# EAGLE board v2 (EAGLE 8.5.1)
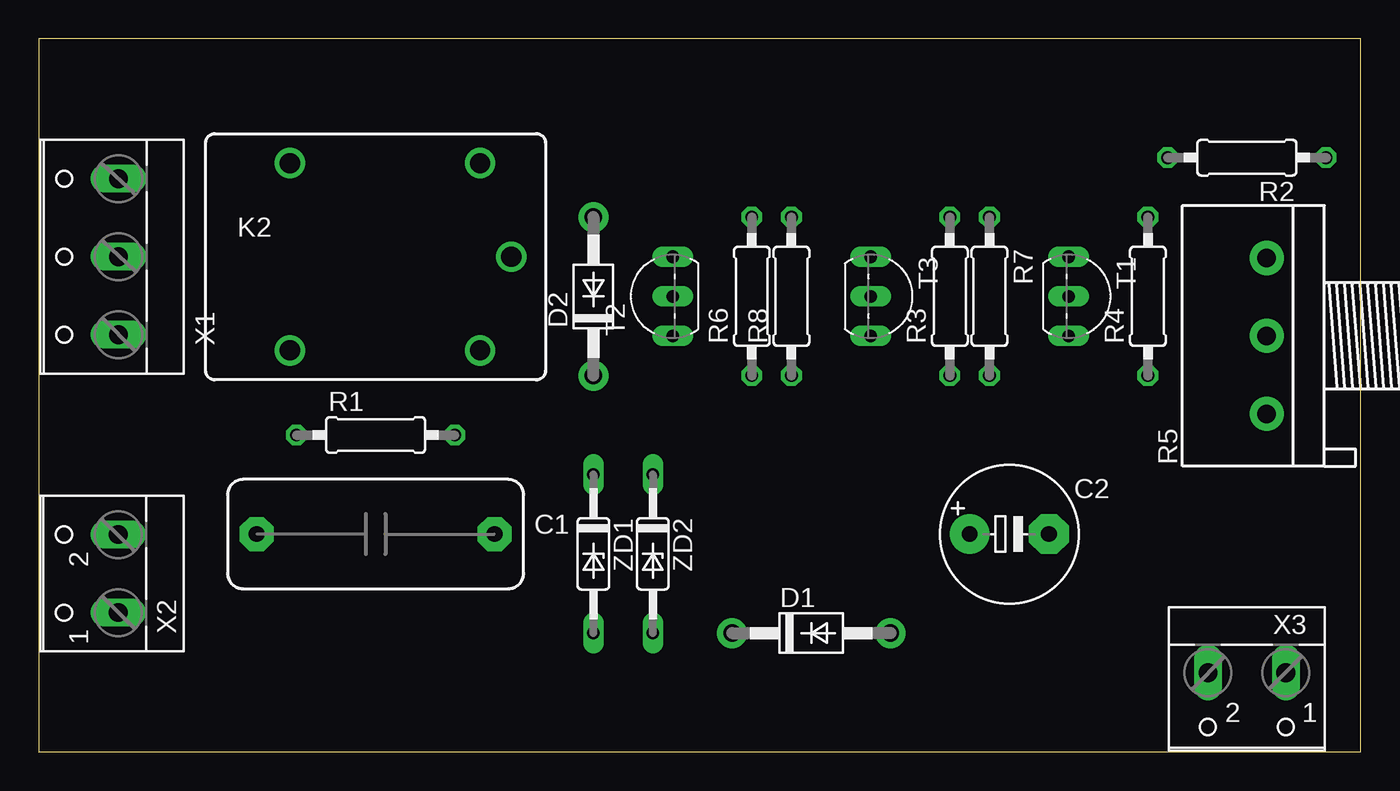
[diagram p0: board, top side]
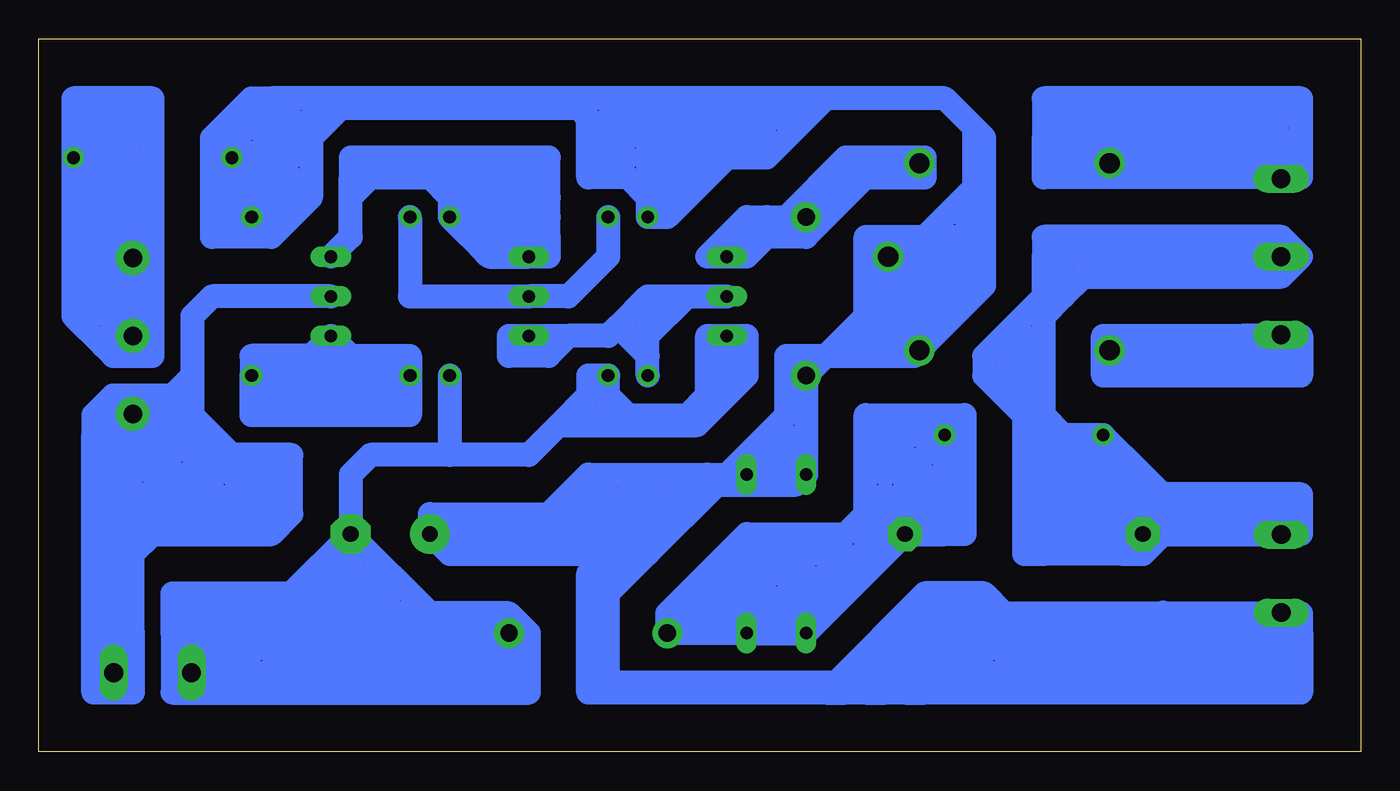
[diagram p1: board, bottom side, seen from below]

Size 84.76 x 45.71 mm. Coordinates in mm from the lower left corner, seen from the top.
Outline: 0,0 84.76,0 84.76,45.71 0,45.71 0,0
Copper layers (1*16): Top 0.035mm / dielectric 1.5mm / Bottom 0.035mm
Design rules "default": minimum track width 6mil, minimum drill 0.35mm, track to track 6mil, track to pad 6mil, pad to pad 6mil, via to via 6mil, smd to smd 6mil, copper to edge 40mil, drill to drill 6mil, minimum pad ring 10mil, minimum via ring 8mil, stop-mask expansion 4mil, vias tented up to drill 0mil, thermal gap 10mil

## Footprints (pad centres in the part's own frame; a part is rotated, then mirrored left to right if it is on the bottom)
C150-190X070 = drill 1.016 pad 2.184 octagon: 1 -7.62,0; 2 7.62,0
E5-8,5 = drill 1.016 pad 2.54: + -2.54,0 | drill 1.016 pad 2.54 octagon: - 2.54,0
DO41-10 = drill 1.118 pad 1.93: A 5.08,0; C -5.08,0
JS-M = drill 1.3: 1 6.7,6; 2 6.7,-6; C 8.7,0; NC -5.5,-6; NO -5.5,6
0207/10 = drill 0.813 octagon: 1 -5.08,0; 2 5.08,0
3RP/1610N = drill 1.2 pad 2.184: 1 -5,0; 2 0,0; 3 5,0
TO92-EBC-OVAL = drill 0.813 long: B 0,-1.27; C 2.54,-1.27; E -2.54,-1.27
W237-103 = drill 1.194 long: 1 -5,-1.29; 2 0,-1.29; 3 5,-1.29
W237-102 = drill 1.194 long: 1 -2.5,-1.27; 2 2.5,-1.27
DO35Z10 = drill 0.813 long: A 5.08,0; C -5.08,0

## Placement (x,y rotation side)
C1  1 uF 450V  [C150-190X070]  21.59,13.97 0 top
C2  1000uF 35V  [E5-8,5]  62.23,13.97 0 top
D1  1N4007  [DO41-10]  49.53,7.62 0 top
D2  1N4007  [DO41-10]  35.56,29.21 90 top
K2  JS-M1-24V-5  [JS-M]  21.59,31.75 0 top
R1  1M  [0207/10]  21.59,20.32 0 top
R2  1K  [0207/10]  77.47,38.1 180 top
R3  51K  [0207/10]  58.42,29.21 90 top
R4  10K  [0207/10]  71.12,29.21 90 top
R5  100k  [3RP/1610N]  78.74,26.67 90 top
R6  1K  [0207/10]  45.72,29.21 90 top
R7  22K  [0207/10]  60.96,29.21 270 top
R8  22K  [0207/10]  48.26,29.21 90 top
T1  2N2222  [TO92-EBC-OVAL]  67.31,29.21 270 top
T2  2N2222  [TO92-EBC-OVAL]  39.37,29.21 90 top
T3  2N2222  [TO92-EBC-OVAL]  54.61,29.21 270 top
X1  [W237-103]  3.81,31.75 90 top
X2  [W237-102]  3.81,11.43 90 top
X3  [W237-102]  77.47,3.81 180 top
ZD1  24V 1Wat  [DO35Z10]  35.56,12.7 270 top
ZD2  24V 1Wat  [DO35Z10]  39.37,12.7 270 top

## Library data of the parts
C1 = cap-master
C2 = rcl; SPICEPREFIX: C
D1 D2 T1-T3 = adafruit
K2 = relay; MF: FARNELL; MPN: JSM1-12V-5; OC_FARNELL: 910351; OC_NEWARK: 14J1764
R1-R4 R6-R8 = rcl; SPICEPREFIX: R
R5 = pot
X1-X3 = con-wago-500
ZD1 ZD2 = diodes

## Nets
L: C2.+ D2.C K2.2 K2.C R2.2 R4.2 R6.2 X2.1 ZD1.C ZD2.C
N: C1.1 R1.1 X1.2 X2.2
N$1: R7.1 R8.2 T3.B
N$2: R3.2 T1.E T3.E
N$3: D2.A K2.1 T2.C
N$4: C1.2 D1.C R1.2 ZD1.A ZD2.A
N$5: R4.1 R7.2 T1.C
N$7: R6.1 T2.B T3.C
N$8: R2.1 R5.2 R5.3
NC: K2.NC X1.1
NO: K2.NO X1.3
S1: R5.1 T1.B X3.1
S2: C2.- D1.A R3.1 R8.1 T2.E X3.2

## Tracks (layer width: path | path; a pad name or v marks a point on that pad's centre or on a via)
L
  Bottom 1.524: 27.94,3.81 26.67,5.08 | 26.67,5.08 26.04,5.71 | 34.29,3.81 48.26,3.81 | K2.C 30.29,29.21 29.21,30.29 29.21,31.75 26.67,31.75 26.67,30.48 29.21,27.94 | 30.29,27.75 30.29,27.94 29.21,27.94 | 30.29,27.75 29.84,27.3 | 29.84,27.3 29.21,26.67 | 29.21,26.67 K2.2 | K2.2 30.48,25.75 | 30.48,25.75 31.75,25.75 | 31.75,25.75 33.94,25.75 D2.C ZD1.C | ZD2.C ZD1.C | ZD2.C 40.64,17.78 | 40.64,17.78 41.27,17.14 | 41.27,17.14 45.72,12.7 | 45.72,12.7 48.26,10.16 48.26,3.81 | 30.29,27.75 31.75,26.29 31.75,25.75 | 29.84,27.3 30.48,26.67 30.48,25.75 | K2.2 24.13,29.91 24.13,33.02 | 24.13,33.02 24.13,39.37 24.77,40.01 | 24.77,40.01 26.67,41.91 34.29,41.91 | 45.72,41.91 45.72,35.56 | 45.72,35.56 R6.2 | 34.29,41.91 45.72,41.91 | 46.99,12.7 58.42,12.7 C2.+ 59.69,15.24 52.07,15.24 | 46.99,12.7 45.72,12.7 | 45.72,41.91 50.8,41.91 | 50.8,41.91 66.04,41.91 | 66.04,41.91 69.85,41.91 | 69.85,41.91 71.75,40.01 | 71.75,40.01 72.39,39.37 | 72.39,39.37 R2.2 72.39,36.83 | 72.39,36.83 72.39,35.56 | 72.39,35.56 R4.2 | 25.4,5.08 26.04,5.71 | 26.04,5.71 25.4,6.35 | 25.4,6.35 24.13,7.62 | 24.13,7.62 24.13,10.16 | 25.4,6.35 24.13,6.35 | 24.13,10.16 25.4,10.16 | 25.4,10.16 27.94,10.16 33.66,4.45 | 33.66,4.45 34.29,3.81 | 34.29,3.81 33.02,3.81 | 31.75,3.81 30.48,3.81 | 29.21,3.81 27.94,3.81 | 29.21,3.81 25.4,7.62 25.4,8.89 | 25.4,10.16 25.4,8.89 | 25.4,8.89 29.21,5.08 | 33.02,3.81 27.94,8.89 26.67,8.89 31.75,3.81 | 31.75,3.81 33.02,3.81 | 25.4,5.08 26.67,5.08 | 29.21,3.81 30.48,3.81 | 30.48,3.81 29.21,5.08 | 29.21,5.08 26.67,5.08 | 48.26,15.24 52.07,15.24 | 52.07,15.24 51.44,15.88 | 51.44,15.88 49.53,17.78 41.91,17.78 | 41.91,17.78 40.64,17.78 | 40.64,17.78 36.83,21.59 36.83,25.4 34.29,25.4 | 34.29,25.4 28.64,25.4 K2.2
  Bottom 1.524: 31.75,27.94 31.11,28.57 | 31.11,28.57 30.48,29.21 | 31.11,28.57 31.75,29.21 | 31.75,29.21 31.75,33.02 27.94,33.02 | 27.94,33.02 25.4,33.02 | 25.4,33.02 24.13,33.02 | 29.21,26.67 25.4,30.48 25.4,33.02 | 29.21,27.94 29.21,29.21 27.94,30.48 | 34.29,25.4 31.75,27.94 | 31.75,27.94 31.75,29.21 | 48.26,3.81 49.53,3.81 49.53,11.43 48.26,11.43 46.99,12.7 | 33.66,4.45 47.62,4.45 48.26,3.81 | 46.99,12.7 45.72,13.97 | 45.72,13.97 43.81,15.88 45.09,15.88 | 41.91,17.78 43.18,16.51 44.45,16.51 45.09,15.88 | 45.09,15.88 46.99,13.97 | 45.72,13.97 49.53,13.97 46.99,16.51 45.72,16.51 48.26,13.97 58.42,13.97 | 51.44,15.88 48.9,15.88 48.26,16.51 49.53,16.51 | ZD2.C 36.83,20.32 36.83,19.05 38.1,19.05 ZD2.C | 41.27,17.14 36.2,17.14 ZD1.C | 35.56,40.64 38.1,38.1 40.64,38.1 44.45,34.29 R6.2 | R6.2 44.45,35.56 | 44.45,35.56 40.64,39.37 | 40.64,39.37 40.64,40.64 | 40.64,40.64 44.45,40.64 44.45,36.83 | 44.45,35.56 44.45,36.83 | 44.45,36.83 43.18,38.1 43.18,39.37 40.64,39.37 | 40.64,39.37 38.1,39.37 | 34.29,41.91 35.56,40.64 | 35.56,40.64 40.64,40.64 | 45.72,35.56 46.99,36.83 49.53,36.83 49.53,40.64 | 49.53,40.64 50.16,41.27 | 50.16,41.27 50.8,41.91 | 49.53,40.64 46.99,38.1 48.26,38.1 48.26,40.64 46.99,40.64 46.99,39.37 | 50.16,41.27 65.41,41.27 67.31,39.37 | 67.31,39.37 67.31,35.56 69.85,33.02 73.66,33.02 73.66,34.29 | 73.66,34.29 73.66,39.37 71.12,41.91 69.85,41.91 | 73.66,34.29 69.85,34.29 68.58,35.56 68.58,36.83 69.85,35.56 72.39,35.56 | 72.39,36.83 69.85,36.83 67.31,39.37 | 66.04,41.91 69.85,38.1 71.12,38.1 | 71.12,38.1 72.39,39.37 | 71.75,40.01 69.22,40.01 68.58,40.64 69.85,40.64 69.85,39.37 71.12,38.1 | 27.94,3.81 3.81,3.81 3.81,5.08
  Bottom 1.524: 27.94,33.02 25.4,35.56 | 25.4,35.56 24.77,36.2 24.77,40.01 | 25.4,35.56 25.4,34.29 | 24.13,10.16 22.86,8.89 12.7,8.89 | 12.7,8.89 12.66,8.93 | 12.7,8.89 5.04,8.89 | 5.04,8.89 X2.1 4.42,8.28 | 5.04,8.89 3.81,8.89 3.81,7.66 | 4.42,8.28 3.81,7.66 | 3.81,7.66 3.81,6.35 | 3.81,6.35 3.81,5.08 | 25.4,5.08 3.81,5.08 | 3.81,6.35 22.86,6.35 24.13,7.62 | 24.13,7.62 5.08,7.62 4.42,8.28
N
  Bottom 1.524: C1.1 13.97,16.51 | 13.97,16.51 13.97,17.78 | 13.97,17.78 R1.1 17.78,20.32 | 17.78,20.32 19.05,20.32 | 19.05,20.32 20.32,21.59 | 20.32,31.75 X1.2 5.08,31.75 | X2.2 5.04,13.93 | 3.81,15.24 12.7,15.24 13.97,16.51 | X2.2 5.04,13.97 3.81,13.97 3.81,15.24 | X2.2 12.7,13.93 | 12.7,13.93 13.93,13.93 C1.1 | 3.81,15.24 3.81,16.51 12.7,16.51 13.97,17.78 | C1.1 15.24,12.7 | 20.32,12.7 20.32,13.97 | 20.32,13.97 20.32,19.05 | 20.32,19.05 20.32,21.59 | 15.24,12.7 20.32,12.7 | 20.32,13.97 15.24,13.97 15.24,17.78 16.51,19.05 | 17.78,20.32 16.51,19.05 | 16.51,19.05 16.51,15.24 17.78,15.24 | 17.78,15.24 19.05,15.24 19.05,19.05 17.78,19.05 17.78,15.24 | 20.32,19.05 19.05,20.32 | 20.32,21.59 20.32,27.94 | 20.32,27.94 20.32,29.21 | 20.32,29.21 20.32,30.48 | 20.32,30.48 20.32,31.75 | 20.32,29.21 24.13,25.4 24.13,24.13 21.59,21.59 | 21.59,21.59 21.59,12.7 20.32,12.7 | 21.59,21.59 21.59,24.13 | 21.59,24.13 21.59,26.67 22.86,25.4 21.59,24.13 | 21.59,24.13 22.86,24.13 | 20.32,29.21 19.05,29.21 | 19.05,29.21 17.78,30.48 5.08,30.48 3.81,31.75 5.08,33.02 20.32,33.02 20.32,31.75 | 20.32,30.48 19.05,30.48 | 19.05,29.21 20.32,27.94 | 15.24,12.7 13.93,12.7 12.7,13.93
N$1
  Bottom 1.524: R8.2 48.26,31.75 50.8,29.21 T3.B 60.96,29.21 R7.1
N$2
  Bottom 1.524: 57.78,33.66 R3.2 58.42,35.56 | 57.78,33.66 56.52,32.38 | 56.52,32.38 55.88,31.75 T3.E | T1.E 64.77,33.02 64.77,35.56 | 64.77,35.56 64.77,36.83 | 64.77,36.83 63.5,36.83 | 63.5,36.83 59.69,36.83 | 59.69,36.83 58.42,35.56 | T3.E 52.07,33.02 | 64.77,36.83 64.77,38.1 52.07,38.1 52.07,35.56 | 52.07,33.02 52.07,34.29 | 52.07,34.29 52.07,35.56 | 59.69,36.83 53.34,36.83 | 58.42,35.56 52.07,35.56 | 57.78,33.66 57.15,34.29 52.07,34.29 | 56.52,32.38 55.88,33.02 53.34,33.02 | 52.07,33.02 52.07,31.75 T3.E | 63.5,36.83 64.77,35.56
N$3
  Bottom 1.524: K2.1 32.1,37.75 32.38,37.47 | 32.38,37.47 D2.A 36.83,34.29 | T2.C 38.1,34.29 | 38.1,34.29 36.83,34.29 | 31.75,36.83 27.94,36.83 27.94,38.1 33.02,38.1 36.83,34.29 | 32.38,37.47 31.75,36.83 | 31.75,36.83 35.56,33.02 38.1,33.02 39.37,31.75 41.91,31.75 39.37,34.29 38.1,34.29
N$4
  Bottom 1.524: R1.2 29.21,17.78 C1.2 | C1.2 ZD1.A | ZD1.A 36.83,7.62 | 36.83,7.62 38.1,7.62 | 38.1,7.62 ZD2.A | ZD2.A D1.C 44.45,8.89 39.37,13.97 33.02,13.97 31.75,15.24 31.75,21.59 25.4,21.59 25.4,13.97 26.67,13.97 | 26.67,13.97 R1.2 | R1.2 30.48,20.32 30.48,17.78 29.21,19.05 27.94,17.78 27.94,15.24 29.21,15.24 30.48,16.51 30.48,13.97 31.75,13.97 31.75,12.7 36.83,7.62 | 38.1,7.62 33.02,12.7 39.37,12.7 41.91,10.16 | 41.91,10.16 43.18,8.89 38.1,8.89 | 38.1,8.89 35.56,11.43 39.37,11.43 40.64,10.16 | 40.64,10.16 41.91,10.16 | 40.64,10.16 38.1,10.16 | 38.1,8.89 ZD2.A | ZD2.A ZD1.A | C1.2 26.67,13.97
N$5
  Bottom 1.524: T1.C 66.04,24.13 | 66.04,24.13 R7.2 | 66.04,24.13 68.58,24.13 | R7.2 60.96,21.59 71.12,21.59 71.12,22.86 | 71.12,22.86 R4.1 | 71.12,22.86 62.23,22.86 | T1.C 67.31,25.4 | 67.31,25.4 68.58,24.13 | 68.58,24.13 R4.1 | T1.C 64.77,25.4 60.96,25.4 R7.2 | 67.31,25.4 71.12,25.4 R4.1
N$7
  Bottom 1.524: R6.1 45.72,25.4 | 45.72,25.4 45.72,26.67 | 45.72,26.67 45.72,29.21 | 45.72,29.21 43.18,29.21 | 43.18,29.21 T2.B | 47.62,27.3 48.26,26.67 50.8,26.67 | 47.62,27.3 45.72,29.21 | 45.72,25.4 47.62,27.3 | 45.72,26.67 43.18,29.21 | T3.C 52.07,25.4 | 50.8,26.67 52.07,25.4 | 52.07,25.4 54.61,25.4 54.61,26.67 50.8,26.67
N$8
  Bottom 1.524: 80.01,38.1 78.74,38.1 R5.3 R5.2 77.47,26.67 | 80.01,38.1 R2.1 | 82.55,39.37 82.55,41.91 77.47,41.91 77.47,26.67 | 82.55,39.37 82.55,27.94 80.64,26.04 | 80.64,26.04 80.01,25.4 77.47,25.4 77.47,26.67 | 80.64,26.04 80.01,26.67 80.01,38.1 | 80.01,38.1 81.28,36.83 81.28,27.94 | 82.55,39.37 78.74,39.37 78.74,40.64 81.28,40.64
NC
  Bottom 1.524: K2.NC 10.16,25.75 | 10.16,25.75 8.54,25.75 | 8.54,25.75 6,25.75 5.08,26.67 | 7.62,26.67 8.54,25.75 | 16.51,26.67 16.51,24.13 3.81,24.13 3.81,26.67 5.18,26.67 | 16.51,26.67 15.24,25.4 3.81,25.4 3.81,25.46 X1.1 5.18,26.67 | 16.51,26.67 11.08,26.67 | 11.08,26.67 10.16,25.75 | 11.08,26.67 7.62,26.67 | 5.18,26.67 7.62,26.67
NO
  Bottom 1.524: K2.NO 6.1,37.75 X1.3 | 20.32,39.37 20.32,41.91 3.81,41.91 3.81,36.83 5.02,36.83 X1.3 | 20.32,39.37 20.32,36.83 5.18,36.83 X1.3 | 5.1,40.62 5.08,40.64 19.05,40.64 19.05,38.1 5.08,38.1 5.08,39.37 20.32,39.37
S1
  Bottom 1.524: T1.B 73.66,29.21 74.93,27.94 74.93,24.13 | 74.93,24.13 74.93,21.59 | 74.93,21.59 77.47,21.59 | 77.47,21.59 78.66,21.59 R5.1 80.01,20.4 | 80.01,20.4 80.01,20.32 | 80.01,20.32 80.01,16.51 | 80.01,16.51 80.01,15.24 | 80.01,15.24 80.01,13.97 | 80.01,13.97 80.01,12.7 | 80.01,12.7 80.01,8.89 | 81.28,20.32 80.64,20.95 | 80.64,20.95 80.01,21.59 80.01,20.4 | 80.01,12.7 78.74,12.7 | 78.74,12.7 77.47,13.97 71.12,13.97 | 71.12,13.97 69.85,13.97 68.58,15.24 68.58,19.05 72.39,19.05 74.93,21.59 | 74.93,21.59 74.93,20.32 73.66,19.05 | 73.66,19.05 72.39,17.78 69.85,17.78 69.85,15.24 71.12,15.24 72.39,16.51 | 71.12,16.51 72.39,16.51 | 72.39,16.51 73.66,15.24 | 73.66,15.24 72.39,15.24 71.12,13.97 | 80.01,13.97 74.93,13.97 73.66,15.24 | 80.01,15.24 73.66,15.24 | 80.01,16.51 73.66,16.51 73.66,17.78 | 73.66,17.78 73.66,19.05 | 80.64,20.95 80.64,22.23 | 80.64,22.23 80.01,22.86 76.2,22.86 74.93,24.13 | 77.47,21.59 76.2,20.32 | 76.2,20.32 75.56,19.68 | 75.56,19.68 73.66,17.78 | 73.66,17.78 77.47,17.78 | 77.47,17.78 79.38,19.68 | 79.38,19.68 80.01,20.32 | 77.47,21.59 77.47,20.32 78.74,20.32 77.47,19.05 | 77.47,19.05 78.74,17.78 79.38,18.41 79.38,19.68 | 75.56,19.68 77.47,17.78 | 77.47,19.05 76.2,20.32 | 78.74,7.62 79.97,8.85 X3.1 79.97,3.85 80.01,3.81 | 78.74,7.62 78.74,12.7 | 78.74,7.62 78.74,3.81 80.01,3.81 | 80.01,3.81 81.28,3.81 81.28,20.32 | 80.64,22.23 81.28,21.59 81.28,20.32
S2
  Bottom 1.524: C2.- 59.69,8.89 | 59.69,8.89 58.42,7.62 | 58.42,7.62 D1.A | C2.- 68.58,10.16 | 68.58,10.16 69.81,8.93 | 69.81,8.93 X3.2 76.2,8.89 | C2.- 64.77,17.78 63.5,19.05 58.42,19.05 | 58.42,19.05 53.34,19.05 51.44,20.95 | 51.44,20.95 49.53,20.95 | 49.53,20.95 42.55,20.95 40.64,22.86 | 40.64,22.86 T2.E | R3.1 58.42,19.05 | 76.2,8.89 76.2,10.16 69.85,10.16 | 69.85,10.16 69.85,8.89 | 69.81,8.93 71.12,7.62 76.2,7.62 | 76.2,7.62 76.2,8.89 | 76.2,7.62 76.2,3.81 64.77,3.81 | 59.69,8.89 54.61,8.89 53.34,7.62 53.34,3.81 64.77,3.81 | C2.- 64.77,11.43 | 64.77,11.43 64.77,3.81 | 64.77,11.43 66.04,11.43 66.67,10.79 | 74.93,6.35 71.12,6.35 66.67,10.79 | 69.85,10.16 68.58,10.16 | 66.67,10.79 66.67,9.53 67.31,8.89 | 68.58,7.62 69.85,6.35 54.61,6.35 54.61,5.08 74.93,5.08 | 68.58,7.62 67.31,8.89 | 68.58,7.62 58.42,7.62 | 59.69,8.89 67.31,8.89 | 66.67,10.79 66.04,10.16 62.23,10.16 63.5,11.43 | 51.44,20.95 49.53,22.86 | 49.53,22.86 48.9,23.5 | 48.9,23.5 R8.1 | 48.26,21.59 R8.1 | 48.9,23.5 46.99,21.59 43.18,21.59 41.91,22.86 41.91,26.67 39.37,26.67 39.37,24.13 40.64,22.86 | 49.53,20.95 49.53,21.59 | R8.1 49.53,24.13 49.53,22.86 | 76.2,8.89 71.12,8.89